# Altium PCB superhet1.PcbDoc (part 4 of 5)
Units mm, origin at the board's own origin, x right, y up, seen from the top; angles counter-clockwise.
Board outline 77 x 100 mm, 4 copper layers (Top Layer, Internal Plane 1, Signal Layer 1, Bottom Layer), stack 0.778 mm thick; 440 components, 348 nets, 1672 pads, 2403 vias.
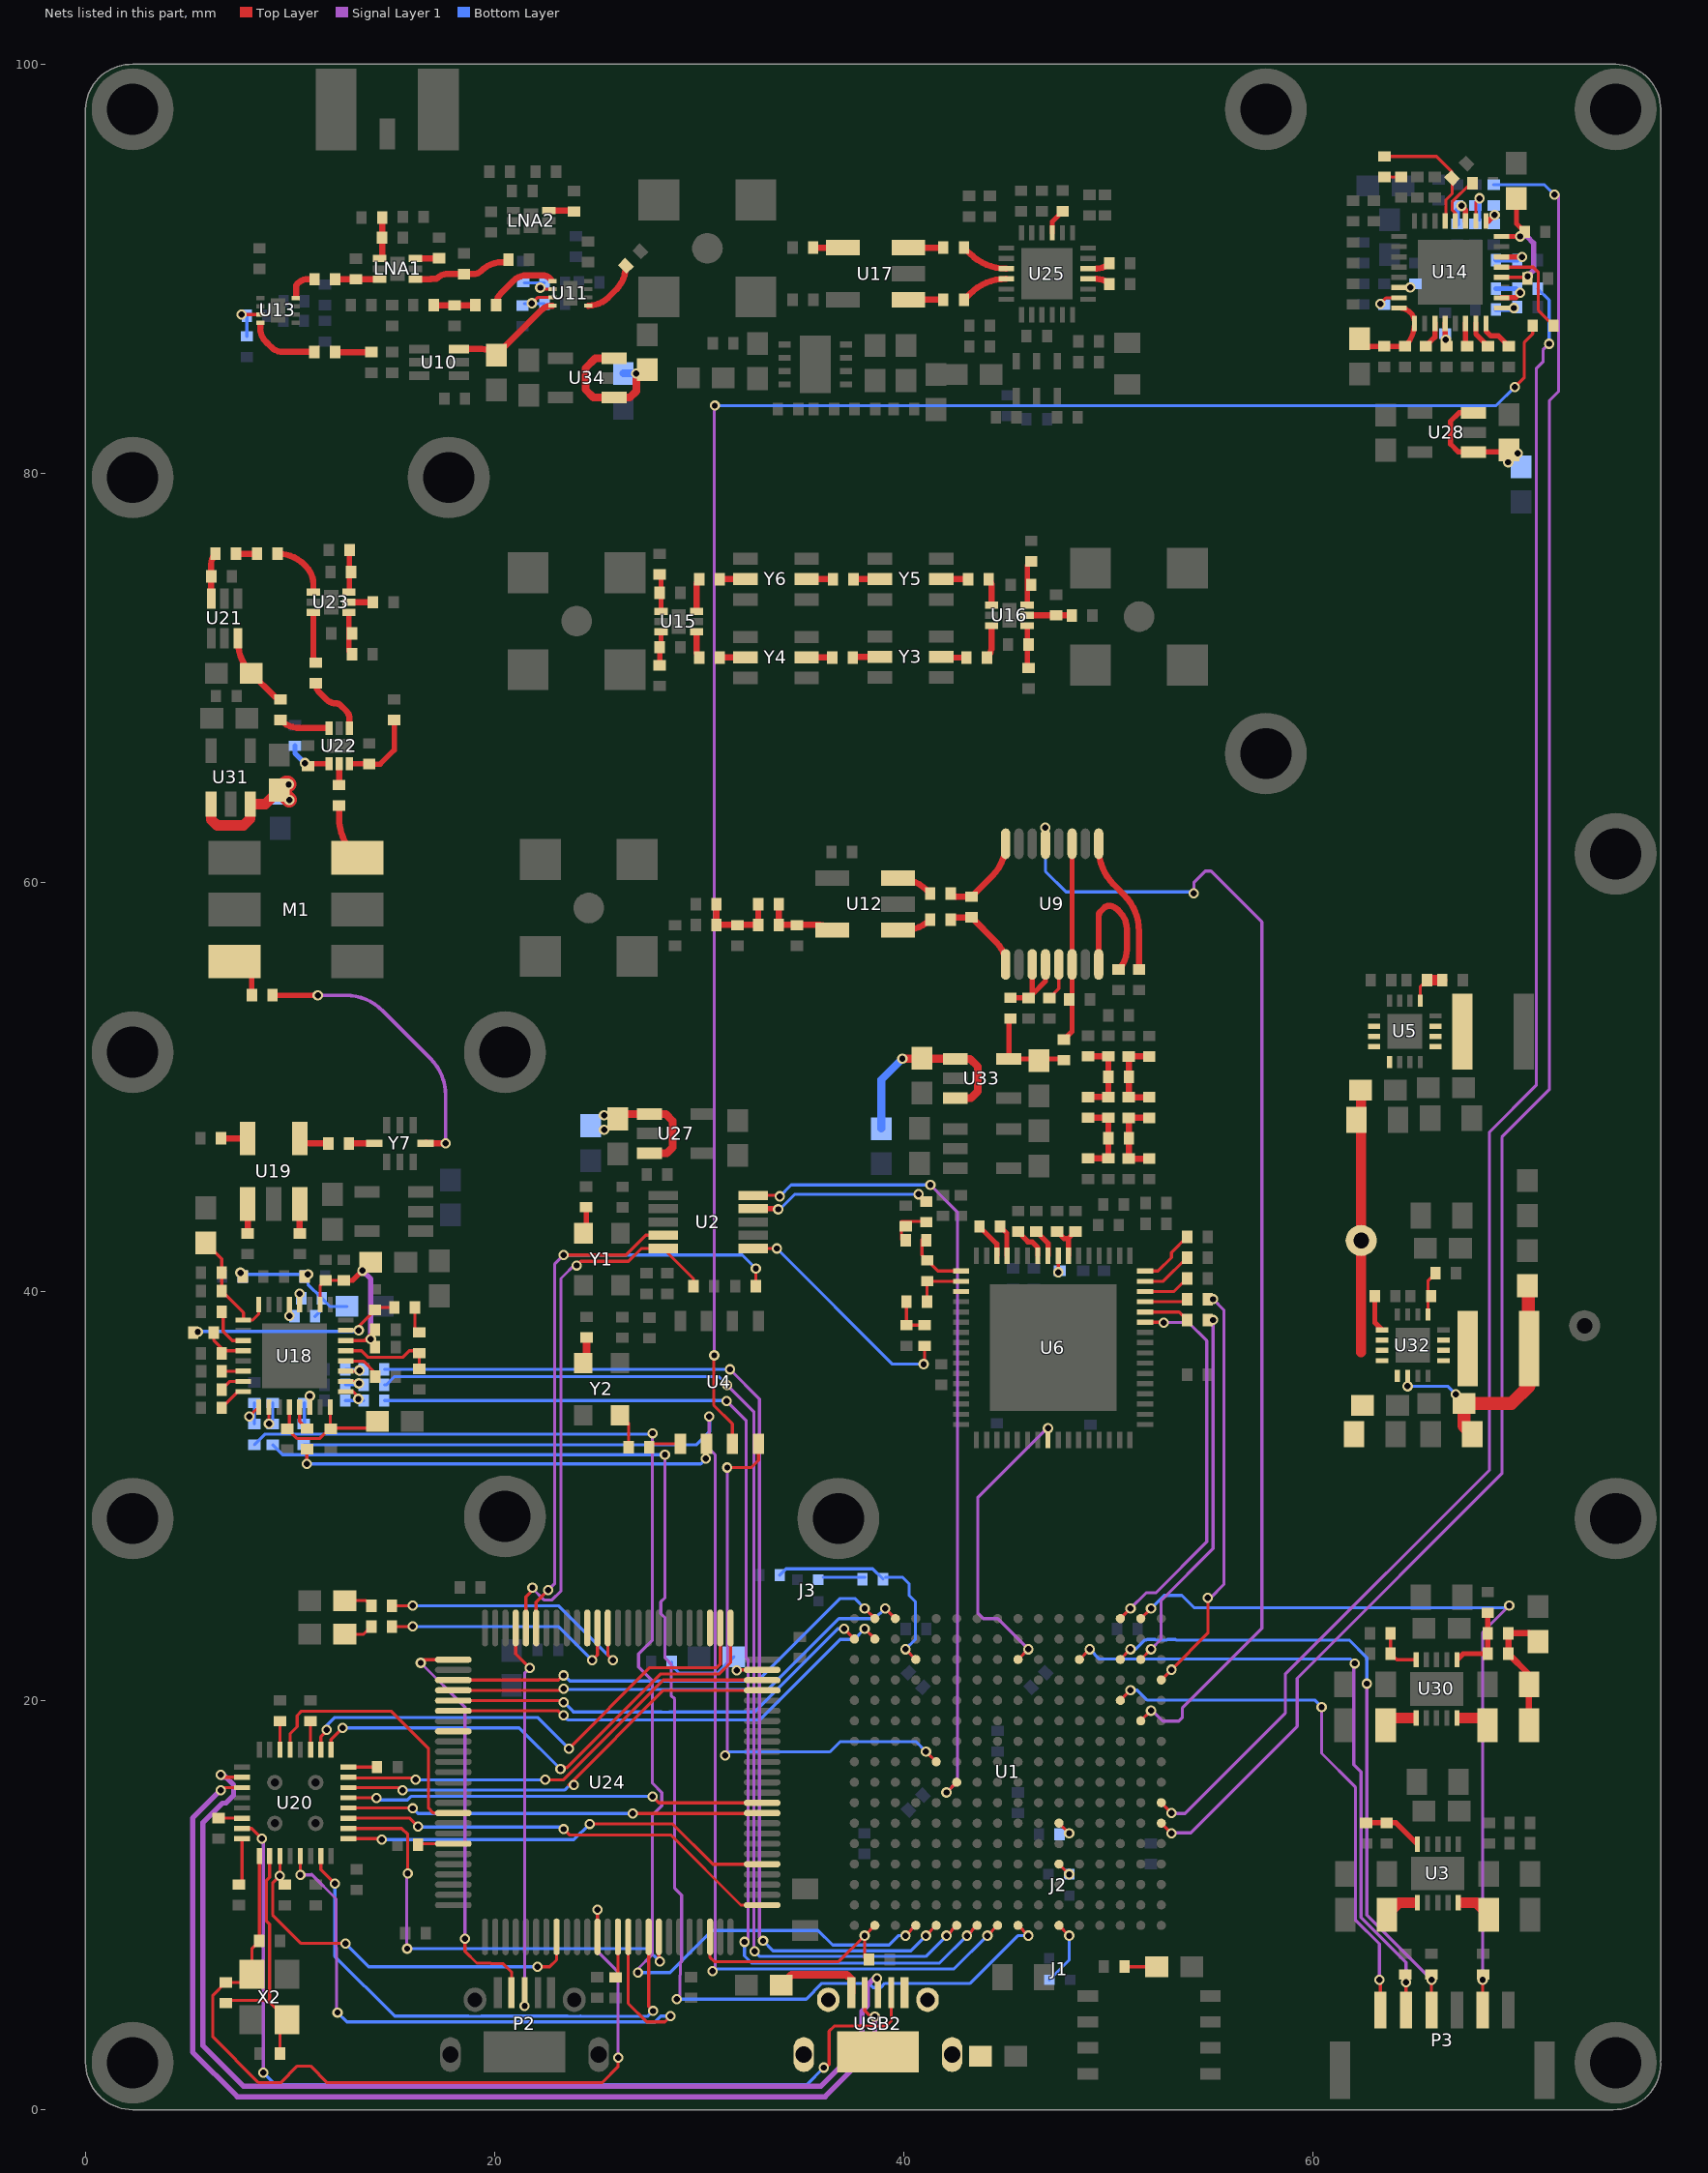
[diagram p6: the nets of this part, all layers, seen from the top]

## Via types
v1: diameter 0.508, hole 0.305, Top Layer to Bottom Layer, 1419 vias
v2: diameter 0.508, hole 0.305, Top Layer to Bottom Layer, tented both sides, 723 vias
v3: diameter 0.5, hole 0.3, Top Layer to Bottom Layer, tented both sides, 254 vias
v4: diameter 1.27, hole 0.762, Top Layer to Bottom Layer, tented both sides, 6 vias
v5: diameter 1.27, hole 0.711, Top Layer to Bottom Layer, tented both sides, 1 vias

## Nets (pads, with @x,y where several pads share a name; then routed paths per layer and width w, separated by ;. In a path a pad name is that pad's centre, name@x,y a point inside that pad or via, vN(x,y) a via of type N, cw(c..) or ccw(c..) an arc to the next point about the centre after c; other vN are vias at no path point) (continued)
NetC71_2: C71.2 U11.1 | length 2.9
  Top Layer w0.305: U11.1@24.57,88.2 ccw(c24.57,89.618) 25.572,88.615 25.927,88.97 ccw(c24.757,90.141) C71.2@26.412,90.141
NetC72_2: C72.2 R65.2 U13.3 | length 1.9
  Top Layer w0.152: v2(7.631,87.768) U13.3@8.538,87.768
  Bottom Layer w0.152: R65.2@7.884,86.698 C72.2@7.884,87.714
NetC74_1: C74.1 U6.57 | length 1.4
  Top Layer w0.254: C74.1@46.482,42.934 47.05,42.366 U6.57@47.05,41.75
NetC75_1: C75.1 C76.1 U6.55 | length 2
  Top Layer w0.254: C75.1@47.498,42.934 47.835,42.597 48.05,42.597 ; U6.55@48.05,41.75 48.05,42.597 ; C76.1@48.387,42.934 48.05,42.597
NetC77_2: C77.2 R68.1 U11.6 | length 1.7
  Top Layer w0.152: v2(22.225,89.078) 22.225,89.002 22.227,89 U11.6@22.83,89
  Bottom Layer w0.152: R68.1@21.444,89.308 C77.2@22.43,89.308
NetC78_2: C78.2 R69.1 U11.7 | length 2.1
  Top Layer w0.152: v2(21.819,88.316) 22.103,88.6 U11.7@22.83,88.6
  Bottom Layer w0.152: R69.1@21.447,88.292 C78.2@22.43,88.292
NetC80_1: C80.1 U12.1 | length 1.8
  Top Layer w0.305: U12.1@39.709,60.212 cw(c39.709,58.252) 41.095,59.638 C80.1@41.283,59.45
NetC80_2: C80.2 R53.1 U9.16 | length 4.2
  Top Layer w0.305: C80.2@42.291,59.45 ccw(c42.651,59.81) 42.651,59.301 R53.1@43.307,59.301 44.326,60.32 ccw(c42.753,61.892) U9.16@44.977,61.892
NetC81_1: C81.1 U9.9 | length 6.7
  Top Layer w0.305: U9.9@49.527,61.892 49.527,61.679 ccw(c52.052,61.679) 50.267,59.893 50.756,59.404 cw(c48.96,57.608) 51.5,57.608 C81.1@51.5,55.75
NetC83_2: C83.2 R35.2 R36.1 R40.1 R105.2 | length 4.1
  Top Layer w0.305: R105.2@30.845,58.94 R35.2@30.845,57.924 R36.1@32.885,57.924 R40.1@32.885,58.94
NetC84_2: C84.2 R36.2 R40.2 U12.4 | length 3.7
  Top Layer w0.305: R40.2@33.893,58.94 R36.2@33.893,57.924 35.901,57.924 cw(c35.901,57.064) U12.4@36.509,57.672
NetC86_1: C86.1 R54.1 R56.2 R59.1 R66.2 | length 4
  Top Layer w0.305: R56.2@49,49.508 R66.2@50,49.508 C86.1@50,50.5 R54.1@50,51.5 R59.1@49,51.5
NetC86_2: C86.2 R37.2 R38.1 R41.2 R51.1 | length 4
  Top Layer w0.305: R51.1@52,49.5 R38.1@51,49.5 R37.2@51,51.492 R41.2@52,51.492
NetC87_1: C87.1 R56.1 R58.2 R66.1 R67.2 | length 4
  Top Layer w0.305: R58.2@49,46.508 R67.2@50,46.508 C87.1@50,47.5 R66.1@50,48.5 R56.1@49,48.5
NetC87_2: C87.2 R38.2 R39.1 R51.2 R52.1 | length 4
  Top Layer w0.305: R52.1@52,46.5 R39.1@51,46.5 R38.2@51,48.492 R51.2@52,48.492
NetC88_1: C88.1 L20.1 | length 1.8
  Top Layer w0.305: C88.1@12.194,85.936 12.202,85.928 L20.1@13.98,85.928
NetC88_2: C88.2 U13.4 | length 3.5
  Top Layer w0.305: U13.4@8.538,87.3 8.538,87.126 8.534,87.122 ccw(c9.516,87.122) 8.822,86.428 9.068,86.182 ccw(c9.662,86.777) 9.662,85.936 C88.2@11.186,85.936
NetC90_1: C90.1 U12.3 | length 1.7
  Top Layer w0.305: U12.3@39.709,57.672 40.057,57.672 ccw(c40.057,59.406) C90.1@41.283,58.18
NetC90_2: C90.2 R53.2 U9.1 | length 4
  Top Layer w0.305: C90.2@42.291,58.18 cw(c42.564,57.907) 42.564,58.293 R53.2@43.307,58.293 44.531,57.069 cw(c43.454,55.992) U9.1@44.977,55.992
NetC91_1: C91.1 U9.8 | length 6.8
  Top Layer w0.305: U9.8@49.527,55.992 49.527,58.381 cw(c49.797,58.381) 49.606,58.572 49.796,58.762 cw(c50.013,58.545) 50.013,58.852 cw(c50.013,58.239) 50.446,58.672 50.546,58.572 cw(c49.688,57.714) 50.902,57.714 50.902,56.72 cw(c49.53,56.72) C91.1@50.5,55.75
NetC92_1: C92.1 R70.2 U9.3 U9.4 | length 4.3
  Top Layer w0.254: R70.2@45.212,54.356 46.109,54.356 C92.1@46.277,54.524 ; U9.3@46.277,55.992 C92.1@46.277,54.524 ; U9.4@46.927,55.992 46.927,55.174 C92.1@46.277,54.524
NetC93_1: C93.1 U9.5 | length 1.8
  Top Layer w0.152: C93.1@47.117,54.348 47.577,54.808 U9.5@47.577,55.992
NetC94_2: C94.2 R107.2 U24.49 | length 5.2
  Top Layer w0.152: v3@31.75,21.336 v3@31.839,21.425 ; v3(31.839,21.481) v3@31.839,21.425 ; U24.49@33.077,21.502 31.916,21.502 v3@31.839,21.425
  Bottom Layer w0.152: R107.2@28.651,21.895 28.651,21.717 29.032,21.336 30.886,21.336 C94.2@31.699,22.149
NetC96_1: C96.1 C97.1 FB3.1 U14.16 U14.17 | length 5
  Top Layer w0.254: FB3.1@61.962,86.563 ccw(c62.807,87.408) 62.807,86.213 C96.1@63.486,86.213 C97.1@64.502,86.213 ccw(c63.387,87.328) 64.964,87.328 U14.17@64.964,87.334 ; U14.16@64.214,88.084 cw(c64.214,87.286) 64.778,87.85 cw(c64.33,87.402) U14.17@64.964,87.402
NetC99_1: C99.1 C131.1 FB4.2 U14.28 U14.32 | length 6.5
  Top Layer w0.152: U14.28@69.214,89.584 C131.1@70.418,89.584
  Top Layer w0.254: U14.32@69.214,91.584 v2(70.127,91.584) C99.1@70.352,91.809 69.952,92.209 FB4.2@69.952,93.142
  Signal Layer 1 w0.254: v2(70.127,91.584) 70.468,91.584 70.79,91.262 70.79,89.921 v2(70.495,89.627)
  Bottom Layer w0.254: v2@70.48,89.611 v2(70.495,89.627)
NetC100_2: C100.2 R31.2 | length 0.8
  Top Layer w0.152: R31.2@63.5,94.488 C100.2@64.313,94.488
NetC101_1: C101.1 U14.19 | length 1.3
  Top Layer w0.254: C101.1@65.518,86.213 65.964,86.659 U14.19@65.964,87.334
NetC102_1: C102.1 Y3.2 | length 1.2
  Top Layer w0.305: Y3.2@41.837,71.021 ccw(c41.905,71.089) 41.905,70.993 C102.1@43.061,70.993
NetC102_2: C102.2 U16.6 | length 1.6
  Top Layer w0.305: C102.2@44.069,70.993 ccw(c43.528,71.534) 44.293,71.534 U16.6@44.293,72.553
NetC103_1: C103.1 U15.4 | length 1.3
  Top Layer w0.305: U15.4@29.87,72.25 29.87,71.314 ccw(c30.314,71.314) C103.1@30,71
NetC103_2: C103.2 Y4.5 | length 1.2
  Top Layer w0.305: C103.2@31.008,71 Y4.5@32.25,71
NetC104_2: C104.2 R74.2 U15.3 | length 1.6
  Top Layer w0.254: R74.2@28.067,70.612 C104.2@28.067,71.501 ; C104.2@28.13,71.564 U15.3@28.13,72.25
NetC105_1: C105.1 Y4.2 | length 1.3
  Top Layer w0.305: Y4.2@35.25,71 C105.1@36.5,71
NetC105_2: C105.2 Y3.5 | length 1.3
  Top Layer w0.305: C105.2@37.508,71 cw(c37.559,70.949) 37.559,71.021 Y3.5@38.837,71.021
NetC106_2: C106.2 R75.2 U16.1 | length 2
  Top Layer w0.254: R75.2@46.033,70.553 U16.1@46.033,72.553
NetC107_2: C107.2 R76.2 U15.1 | length 1.7
  Top Layer w0.254: U15.1@28.13,73.25 R76.2@28.13,74.994
NetC108_2: C108.2 R61.2 U20.25 U24.12 X2.3 | length 41.5
  Top Layer w0.152: U20.25@8.5,12.4 8.5,8.258 C108.2@8.492,8.25 8.136,7.894 X2.3@8.136,6.618 7.742,6.223 R61.2@6.858,6.223 6.223,5.588 6.223,3.556 8.458,1.321 9.539,1.321 10.352,2.134 10.998,2.134 11.811,1.321 25.248,1.321 26.035,2.108 v3(26.035,2.54) ; v3(25.019,9.779) 25.027,9.771 U24.12@25.027,8.452
  Signal Layer 1 w0.152: v3(25.019,9.779) 25.019,7.747 26.035,6.731 v3(26.035,2.54)
NetC110_2: C110.2 R61.1 U20.26 X2.1 | length 12.6
  Top Layer w0.152: R61.1@6.858,5.215 6.858,5.34 8.91,5.34 9,5.25 ; U20.26@9,12.4 9,11.361 8.839,11.2 8.839,9.238 9,9.077 9,5.25 ; C110.2@9.508,2.75 9.508,4.058 X2.1@9.85,4.4 9,5.25
NetC111_1: C111.1 C222.2 U16.2 | length 2.2
  Top Layer w0.178: C222.2@48.207,73.053 C222.2@48.209,73.05
  Top Layer w0.305: U16.2@46.036,73.05 C222.2@48.209,73.05
NetC112_1: C112.1 Y5.2 | length 1.3
  Top Layer w0.305: Y5.2@41.837,74.831 C112.1@43.139,74.831
NetC112_2: C112.2 U16.4 | length 1.3
  Top Layer w0.305: C112.2@44.147,74.831 cw(c43.795,74.478) 44.293,74.478 U16.4@44.293,73.553
NetC113_1: C113.1 U15.6 | length 1.6
  Top Layer w0.305: U15.6@29.87,73.25 29.87,74.517 cw(c30.314,74.517) C113.1@30,74.831
NetC113_2: C113.2 Y6.5 | length 1.2
  Top Layer w0.305: C113.2@31.008,74.831 Y6.5@32.25,74.831
NetC114_1: C114.1 Y6.2 | length 1.3
  Top Layer w0.305: Y6.2@35.25,74.831 C114.1@36.535,74.831
NetC114_2: C114.2 Y5.5 | length 1.3
  Top Layer w0.305: C114.2@37.543,74.831 Y5.5@38.837,74.831
NetC115_2: C115.2 R77.2 U16.3 | length 1.9
  Top Layer w0.254: U16.3@46.033,73.553 R77.2@46.033,75.497
NetC128_1: C128.1 U17.3 | length 1.7
  Top Layer w0.305: U17.3@40.223,88.491 C128.1@41.933,88.491
NetC128_2: C128.2 U25.16 | length 2.4
  Top Layer w0.305: C128.2@42.941,88.491 43.223,88.773 cw(c45.005,86.991) U25.16@45.005,89.511
NetC129_1: C129.1 U17.5 | length 1.5
  Top Layer w0.305: C129.1@35.567,91.031 U17.5@37.023,91.031
NetC132_1: C132.1 C143.1 FB2.2 U18.16 U18.17 | length 5.9
  Top Layer w0.152: FB2.2@5.869,42.378 6.651,41.596 C132.1@6.651,40.919 C143.1@6.651,40.03 7.715,38.966 U18.17@7.715,38.605 8.176,38.605 8.465,38.894 U18.16@8.465,39.355
NetC133_2: C133.2 U25.4 | length 0.7
  Top Layer w0.305: 49.43,90.011 ccw(c49.43,90.892) C133.2@50.053,90.269
NetC134_2: C134.2 U25.3 | length 0.7
  Top Layer w0.305: 49.43,89.511 cw(c49.43,88.63) C134.2@50.053,89.253
NetC135_1: C135.1 C136.1 FB1.1 U18.28 U18.32 | length 6.9
  Top Layer w0.152: C136.1@9.855,33.291 10.33,32.817 11.463,32.817 C135.1@11.965,33.319 ; C136.1@9.965,33.401 U18.28@9.965,34.355 ; U18.32@11.965,34.355 C135.1@11.965,33.319 ; FB1.1@14.263,33.655 13.927,33.319 C135.1@11.965,33.319
NetC137_1: C137.1 C138.1 C139.1 C140.1 FB6.1 U18.6 U18.10 | length 9.7
  Top Layer w0.152: U18.10@11.465,39.355 11.465,40.272 C139.1@11.739,40.546 ; C139.1@11.739,40.546 C140.1@12.624,40.546 ; U18.6@12.715,37.605 13.635,37.605 ; C137.1@14.156,37.287 13.838,37.605 13.635,37.605 ; C138.1@14.156,38.125 13.635,37.605
  Top Layer w0.254: C140.1@12.624,40.546 13.056,40.546 v2(13.531,41.021) FB6.1@13.937,41.427
  Signal Layer 1 w0.254: v2(13.531,41.021) 13.945,40.607 v2(13.945,37.668)
NetC141_1: C141.1 C142.1 FB8.2 L2.1 L5.1 R84.1 R85.1 | length 8
  Top Layer w0.152: v2(7.569,40.919) 7.569,40.652 L5.1@7.683,40.538 ; L2.1@10.715,40.538 10.871,40.694 v2(10.871,40.843)
  Bottom Layer w0.152: v2(7.569,40.919) 7.645,40.843 v2(10.871,40.843) 10.871,40.353 R84.1@11.549,39.675 11.956,39.268 FB8.2@12.78,39.268 ; R85.1@11.219,38.786 11.477,39.044 R84.1@11.477,39.675
NetC144_1: C144.1 C145.1 R87.2 U18.7 | length 10.9
  Top Layer w0.152: U18.7@12.715,38.105 v2@13.154,38.105 ; v2(13.355,38.105) v2@13.154,38.105 ; C145.1@15.096,39.218 14.267,39.218 C144.1@14.148,39.099 v2@13.154,38.105
  Bottom Layer w0.152: v2(5.486,38.024) 5.512,38.049 13.3,38.049 v2(13.355,38.105)
NetC145_2: C145.2 R88.2 | length 1.3
  Top Layer w0.152: C145.2@16.104,39.218 16.104,38.205 R88.2@16.311,37.998
NetC147_1: C147.1 U18.19 | length 2.2
  Top Layer w0.152: C147.1@6.651,39.014 6.727,39.014 6.727,38.053 7.175,37.605 U18.19@7.715,37.605
NetC148_1: C148.1 U18.23 | length 1.2
  Top Layer w0.152: C148.1@6.651,35.204 7.052,35.605 U18.23@7.715,35.605
NetC149_1: C149.1 U18.24 | length 1.4
  Top Layer w0.152: C149.1@6.651,34.315 7.441,35.105 U18.24@7.715,35.105
NetC150_2: C150.2 U19.1 | length 1.4
  Top Layer w0.305: C150.2@10.469,42.836 U19.1@10.469,44.284
NetC151_1: C151.1 U19.4 | length 1.3
  Top Layer w0.305: C151.1@6.619,47.492 U19.4@7.921,47.492
NetC152_2: C152.2 U19.3 | length 1.4
  Top Layer w0.305: C152.2@7.929,42.836 U19.3@7.929,44.284
NetC153_1: C153.1 U19.5 | length 1.5
  Top Layer w0.305: U19.5@10.469,47.484 ccw(c11.053,48.068) 11.053,47.242 C153.1@11.869,47.242
NetC153_2: C153.2 Y7.4 | length 1.2
  Top Layer w0.305: C153.2@12.877,47.242 Y7.4@14.119,47.242
NetC155_2: C155.2 L7.2 U21.3 | length 2.2
  Top Layer w0.305: U21.3@6.14,73.881 6.14,75.566 cw(c6.857,75.566) L7.2@6.35,76.073
NetC156_2: C156.2 R92.2 U22.3 | length 3.9
  Top Layer w0.254: U22.3@12.895,65.805 C156.2@13.849,65.805 ; C156.2@13.868,65.786 14.402,65.786 15.088,66.472 R92.2@15.088,67.945
NetC157_2: C157.2 R91.2 U23.1 | length 1.9
  Top Layer w0.254: R91.2@12.877,71.304 U23.1@12.877,73.198
NetC158_1: C158.1 L6.2 U21.6 | length 3.8
  Top Layer w0.305: U21.6@7.44,71.941 7.44,71.831 ccw(c9.702,71.831) L6.2@8.103,70.231 9.278,69.055 ccw(c9.525,69.302) C158.1@9.525,68.953
NetC158_2: C158.2 U22.6 | length 2.5
  Top Layer w0.305: C158.2@9.525,67.945 ccw(c10.491,68.911) 10.491,67.545 U22.6@11.895,67.545
NetC159_1: C159.1 U23.4 | length 2.9
  Top Layer w0.305: C159.1@9.39,76.073 cw(c9.39,74.214) 10.704,75.529 10.77,75.463 cw(c9.883,74.576) 11.137,74.576 U23.4@11.137,74.198
NetC159_2: C159.2 L7.1 | length 1
  Top Layer w0.305: L7.1@7.358,76.073 C159.2@8.382,76.073
NetC160_1: C160.1 U23.2 | length 1.2
  Top Layer w0.305: U23.2@12.877,73.698 C160.1@14.047,73.698
NetC161_1: C161.1 U22.2 | length 1.1
  Top Layer w0.305: U22.2@12.395,65.805 12.395,65.007 ccw(c12.742,65.007) C161.1@12.497,64.762
NetC161_2: C161.2 M1.3 | length 2.8
  Top Layer w0.305: C161.2@12.395,63.754 12.395,63.158 ccw(c14.935,63.158) 13.139,61.362 M1.3@13.287,61.214
NetC162_2: C162.2 R94.2 U22.1 | length 2.2
  Top Layer w0.254: v2(10.719,65.837) C162.2@10.871,65.684 ; C162.2@10.992,65.805 U22.1@11.895,65.805
  Bottom Layer w0.254: R94.2@10.236,66.675 10.236,66.319 v2(10.719,65.837)
NetC163_2: C163.2 R93.2 U23.3 | length 2
  Top Layer w0.254: U23.3@12.903,74.224 R93.2@12.903,76.251
NetC164_1: C164.1 U23.6 | length 2.5
  Top Layer w0.305: U23.6@11.137,73.198 11.137,71.023 ccw(c11.523,71.023) C164.1@11.25,70.75
NetC164_2: C164.2 U22.4 | length 3
  Top Layer w0.305: C164.2@11.25,69.742 ccw(c11.904,69.742) 11.441,69.28 11.766,68.955 ccw(c12.243,69.432) 12.243,68.758 cw(c12.243,68.451) 12.46,68.668 12.751,68.377 cw(c12.402,68.028) 12.895,68.028 U22.4@12.895,67.545
NetC166_2: C166.2 C168.2 LNA1.4 | length 4.8
  Top Layer w0.305: LNA1.4@16.12,89.5 16.881,89.5 16.891,89.51 17.063,89.51 ccw(c17.063,89.77) 17.247,89.586 cw(c17.624,89.209) 17.624,89.742 C166.2@18.5,89.742 18.971,89.742 ccw(c18.971,90.249) 19.329,89.891 cw(c20.376,88.844) 20.376,90.324 C168.2@20.652,90.324
NetC167_1: C167.1 LNA1.1 R95.1 | length 1.9
  Top Layer w0.305: LNA1.1@14.5,90.62 R95.1@14.5,92.5
NetC169_2: C169.2 C183.2 LNA1.3 | length 2.2
  Top Layer w0.305: C183.2@12.202,89.492 12.21,89.5 LNA1.3@14.38,89.5
NetC170_1: C170.1 U2.9 | length 8.4
  Top Layer w0.254: U2.9@32.639,44.054 33.848,44.054 33.858,44.044 v2(33.858,44.018)
  Bottom Layer w0.152: v2(33.858,44.018) 33.946,44.018 34.683,44.755 v2(40.716,44.755)
NetC170_2: C170.2 C172.2 R100.2 | length 1.9
  Top Layer w0.152: R100.2@39.878,42.545 39.878,43.434 C170.2@40.894,43.434
NetC171_1: C171.1 U2.6 | length 11.6
  Top Layer w0.152: U2.6@32.639,42.104 v2(33.791,42.104) ; v2(40.97,36.449) 41.021,36.5 C171.1@41.021,37.346
  Bottom Layer w0.152: v2(33.791,42.104) 39.446,36.449 v2(40.97,36.449)
NetC171_2: C171.2 C173.2 R101.2 | length 2
  Top Layer w0.152: R101.2@40.132,39.497 C173.2@40.132,38.354 C171.2@41.021,38.354
NetC175_1: C175.1 U17.1 | length 1.7
  Top Layer w0.305: U17.1@40.223,91.031 C175.1@41.933,91.031
NetC175_2: C175.2 U25.15 | length 2.4
  Top Layer w0.305: C175.2@42.941,91.031 43.223,90.749 ccw(c45.005,92.532) U25.15@45.005,90.011
NetC180_2: C180.2 R126.2 U27.1 U27.3 | length 5.1
  Top Layer w0.381: C180.2@26.246,48.674 U27.1@27.561,48.674 28.364,48.674 28.702,48.336 28.702,47.041 28.42,46.759 U27.3@27.561,46.759
  other v2: 25.349,47.904 25.349,48.616
NetC181_2: C181.2 R130.2 U28.1 U28.3 | length 5.3
  Top Layer w0.254: U28.3@67.854,82.961 67.137,82.961 66.726,82.55 66.726,81.432 67.112,81.046 U28.1@67.854,81.046 C181.2@69.489,81.046
  other v2: 69.545,80.543 70.002,80.975
NetC183_1: C183.1 U13.8 | length 1.5
  Top Layer w0.305: 10.287,88.671 10.287,89.097 cw(c10.547,89.097) 10.363,89.281 cw(c10.873,88.772) 10.873,89.492 C183.1@11.194,89.492
NetC185_1: C185.1 U14.24 | length 1.8
  Top Layer w0.254: U14.24@68.464,87.334 68.464,86.959 68.469,86.959 68.707,86.721 69.074,86.721 C185.1@69.582,86.213
NetC186_1: C186.1 U14.23 | length 1.4
  Top Layer w0.254: U14.23@67.964,87.334 67.964,86.815 C186.1@68.566,86.213
NetC190_1: C190.1 R110.1 R111.1 U30.1 | length 3.6
  Top Layer w0.254: U30.1@67.044,21.997 67.343,22.296 R110.1@68.545,22.296 C190.1@68.545,23.296 R111.1@68.545,24.296
NetC190_2: C190.2 C191.2 L10.2 R7.2 R110.2 | length 6.5
  Top Layer w0.305: L10.2@70.561,18.796 C191.2@70.561,20.796 70.561,21.288 R110.2@69.553,22.296 C190.2@69.553,23.296 70.582,23.296 R7.2@70.993,22.885
NetC193_2: C193.2 R127.2 U31.1 U31.3 | length 6.6
  Top Layer w0.508: U31.1@6.137,63.825 6.137,63.078 6.426,62.789 7.722,62.789 8.052,63.119 U31.3@8.052,63.825 8.784,63.825 C193.2@9.474,64.516
  Top Layer w0.762: v2(9.931,64.795) 9.881,64.846 9.804,64.846 C193.2@9.474,64.516 v2(9.957,64.033)
NetC194_1: C194.1 Y2.3 | length 1.7
  Top Layer w0.152: Y2.3@26.13,33.951 26.551,33.53 C194.1@26.551,32.385
NetC194_2: C194.2 U4.1 | length 1.6
  Top Layer w0.152: C194.2@27.559,32.385 27.734,32.56 U4.1@29.083,32.56
NetC195_1: C195.1 Y7.8 | length 14.2
  Top Layer w0.254: C195.1@9.136,54.483 v2(11.354,54.483)
  Top Layer w0.305: Y7.8@16.619,47.242 cw(c16.685,47.176) 16.685,47.269 16.711,47.244 v2(17.602,47.244)
  Signal Layer 1 w0.178: v2(11.354,54.483) 12.715,54.483 cw(c12.715,51.943) 14.511,53.739 16.858,51.392 cw(c15.062,49.595) 17.602,49.595 v2(17.602,47.244)
NetC195_2: C195.2 M1.6 | length 0.8
  Top Layer w0.254: C195.2@8.128,54.483 8.128,55.293
NetC196_1: C196.1 U11.5 | length 3.5
  Top Layer w0.305: C196.1@20.068,88.222 cw(c20.912,88.222) 20.315,88.819 20.904,89.408 cw(c21.579,88.733) 21.579,89.687 22.353,89.687 cw(c22.353,89.231) 22.676,89.554 U11.5@22.765,89.465
NetC196_2: C196.2 R18.1 R104.1 | length 2
  Top Layer w0.305: R104.1@17.02,88.222 C196.2@19.06,88.222
NetC199_2: C199.2 C200.2 L11.2 R124.2 U32.14 | length 12.8
  Top Layer w0.152: v2(64.631,35.37) U32.14@64.631,35.873
  Top Layer w0.635: C200.2@67.79,33.027 67.388,33.43 C199.2@67.388,34.527 69.706,34.527 70.564,35.385 L11.2@70.564,37.211 ; R124.2@70.485,40.284 70.524,40.245 L11.2@70.524,37.527
  Bottom Layer w0.152: v2(64.631,35.37) 66.585,35.37 v2(66.98,34.976)
NetC201_1: C201.1 U32.9 | length 1.8
  Top Layer w0.254: C201.1@63.024,39.777 63.024,38.48 U32.9@63.381,38.123
NetC203_2: C203.2 R129.2 U33.1 U33.3 | length 10.1
  Top Layer w0.381: v2(39.929,51.384) 42.5,51.384 U33.1@42.515,51.369 43.246,51.369 43.612,51.003 43.612,49.784 43.282,49.454 U33.3@42.515,49.454
  Bottom Layer w0.381: R129.2@38.9,47.964 38.9,50.355 v2(39.929,51.384)
NetC204_1: C204.1 R114.1 U14.3 | length 1.5
  Top Layer w0.254: v2(67.259,93.078) 67.464,92.873 U14.3@67.464,92.334
  Bottom Layer w0.254: C204.1@67.056,92.194 R114.1@67.056,92.874
NetC205_1: C205.1 R113.1 U14.2 | length 2.2
  Top Layer w0.152: U14.2@67.964,92.334 67.964,93.262 v2(68.148,93.447)
  Bottom Layer w0.152: C205.1@68.148,92.397 v2(68.148,93.447)
NetC206_1: C206.1 R112.1 U14.1 | length 0.5
  Top Layer w0.254: U14.1@68.464,92.334 68.585,92.334 v2(68.885,92.634)
NetC207_1: C207.1 R115.1 U14.30 | length 2
  Top Layer w0.254: U14.30@69.214,90.584 v2(70.223,90.584)
  Bottom Layer w0.254: C207.1@68.953,90.424 R115.1@69.985,90.424
NetC208_1: C208.1 R116.1 U14.25 | length 1.4
  Top Layer w0.254: U14.25@69.214,88.084 v2(69.828,88.084)
  Bottom Layer w0.254: C208.1@68.953,88.011 R116.1@69.755,88.011
NetC209_1: C209.1 R117.1 U14.26 | length 2
  Top Layer w0.254: U14.26@69.214,88.584 69.214,88.592 69.923,88.592 70.129,88.798 v2(70.129,88.824)
  Bottom Layer w0.254: C209.1@68.953,89.027 R117.1@69.926,89.027
NetC210_1: C210.1 R120.1 U18.3 | length 1.4
  Top Layer w0.152: U18.3@12.715,36.105 13.397,36.105 13.397,36.133 v2(13.386,36.144)
  Bottom Layer w0.152: C210.1@12.692,36.195 v2@13.335,36.195
NetC211_1: C211.1 R119.1 U18.2 | length 1.3
  Top Layer w0.152: U18.2@12.715,35.605 13.29,35.605 13.36,35.535 v2(13.36,35.509)
  Bottom Layer w0.152: C211.1@12.692,35.433 v2@13.284,35.433
NetC212_1: C212.1 R118.1 U18.1 | length 1.7
  Top Layer w0.152: U18.1@12.715,35.105 13.079,35.105 13.335,34.849 v2(13.335,34.747)
  Bottom Layer w0.152: C212.1@12.692,34.671 R118.1@13.597,34.671
NetC213_1: C213.1 R121.1 U18.30 | length 1.5
  Top Layer w0.152: U18.30@10.965,34.355 v2(10.965,34.894)
  Bottom Layer w0.152: R121.1@10.693,33.545 C213.1@10.693,34.552
NetC214_1: C214.1 R122.1 U18.26 | length 1.7
  Top Layer w0.152: v2(8.965,33.529) U18.26@8.965,34.355 U18.26@8.966,34.356
  Bottom Layer w0.152: R122.1@9.144,33.708 C214.1@9.144,34.552
NetC215_1: C215.1 R123.1 U18.25 | length 1.7
  Top Layer w0.152: v2(8.001,33.891) U18.25@8.465,34.355
  Bottom Layer w0.152: R123.1@8.255,33.52 C215.1@8.255,34.552
NetC218_1: C218.1 U4.2 | length 21.1
  Top Layer w0.152: v3(10.82,31.572) C218.1@10.82,32.291 ; v3(30.328,31.826) 30.353,31.852 U4.2@30.353,32.56
  Bottom Layer w0.152: v3(10.82,31.572) 30.074,31.572 v3(30.328,31.826)
NetC218_2: C218.2 U18.29 | length 1.2
  Top Layer w0.152: U18.29@10.465,34.355 10.465,33.655 C218.2@10.82,33.299
NetC219_1: C219.1 U4.3 | length 94
  Top Layer w0.152: v3(30.734,36.881) 30.709,36.855 30.709,34.442 31.623,33.528 U4.3@31.623,32.56 ; v3(69.875,84.226) 70.333,84.684 70.333,86.411 70.747,86.825 C219.1@70.747,87.224
  Signal Layer 1 w0.152: v3(30.734,36.881) v3@30.734,83.312
  Bottom Layer w0.152: v3(30.759,83.312) 68.961,83.312 v3(69.875,84.226)
NetC219_2: C219.2 U14.29 | length 4.8
  Top Layer w0.152: U14.29@69.214,90.084 70.764,90.084 71.018,89.83 71.018,87.96 C219.2@71.755,87.224
NetC221_2: C221.2 R131.2 U34.1 U34.3 | length 6.9
  Top Layer w0.381: U34.3@25.837,85.623 24.917,85.623 24.435,85.141 24.435,84.099 24.826,83.708 U34.1@25.837,83.708 26.609,83.708 26.924,84.023 v2(26.924,84.887)
  Bottom Layer w0.381: R131.2@26.289,84.887 v2(26.924,84.887)
NetJ1_2: J1.2 U1.T11 | length 3.3
  Top Layer w0.152: U1.T11@47.585,9.01 v2(48.085,8.51)
  Bottom Layer w0.152: J1.2@47.117,6.35 48.085,7.318 v2(48.085,8.51)
NetJ2_2: J2.2 U1.N11 | length 0.7
  Top Layer w0.152: U1.N11@47.585,12.01 v2(48.085,11.51)
NetJ3_2: J3.2 R42.1 | length 2
  Bottom Layer w0.152: 36.068,26.035 37.846,26.035 R42.1@38.108,26.035
NetL3_1: L3.1 LNA2.6 | length 1.2
  Top Layer w0.305: LNA2.6@22.65,92.843 L3.1@23.845,92.843
NetL8_1: L8.1 LNA1.6 | length 1.2
  Top Layer w0.305: LNA1.6@16.12,90.5 17.243,90.5 ccw(c17.243,90.555) L8.1@17.282,90.516
NetL9_1: L9.1 U30.6 | length 1.5
  Top Layer w0.508: L9.1@63.561,18.796 63.911,19.146 64.897,19.146
NetL10_1: L10.1 U30.10 | length 1.5
  Top Layer w0.508: 67.183,19.146 68.179,19.146 L10.1@68.529,18.796
NetL11_1: L11.1 U32.1 U32.2 U32.3
NetL12_1: L12.1 U5.1 U5.2 U5.3
NetL16_2: L16.2 U10.6 U11.8 | length 5.6
  Top Layer w0.305: U10.6@18.252,86.078 19.365,86.078 cw(c19.365,85.073) L16.2@20.076,85.784 22.254,87.961 cw(c22.83,87.385) U11.8@22.83,88.2
NetL17_1: L17.1 U3.6 | length 1.5
  Top Layer w0.508: L17.1@63.622,9.525 64.222,10.125 64.897,10.125
NetL18_1: L18.1 U3.10 | length 1.5
  Top Layer w0.508: 67.31,10.125 67.99,10.125 L18.1@68.59,9.525
NetLED1_2: LED1.2 R21.2 | length 1.4
  Top Layer w0.152: LED1.2@12.675,24.892 13.716,24.892 R21.2@13.97,24.638
NetLED2_2: LED2.2 R22.2 | length 1.5
  Top Layer w0.152: LED2.2@12.675,23.241 13.589,23.241 R22.2@13.97,23.622
NetLED3_1: LED3.1 R43.2 | length 1.6
  Top Layer w0.152: R43.2@50.787,6.99 52.358,6.99 LED3.1@52.363,6.985
NetR2_2: R2.2 R81.1 U32.5 | length 2.2
  Top Layer w0.152: U32.5@65.631,38.873 65.631,40.536 R2.2@65.989,40.894
NetR3_2: R3.2 U24.94 | length 1.7
  Top Layer w0.152: R3.2@16.256,12.954 16.304,13.002 U24.94@17.977,13.002
NetR4_1: R4.1 U24.14 | length 2
  Top Layer w0.152: R4.1@25.908,6.469 26.027,6.588 U24.14@26.027,8.452
NetR5_2: R5.2 U2.5 U24.71 | length 27.7
  Top Layer w0.152: U24.71@21.527,23.552 21.527,25.075 21.971,25.519 21.971,25.527 v3(21.844,25.527) ; v3(24.003,41.275) 24.206,41.478 26.542,41.478 27.168,42.104 U2.5@28.239,42.104 29.718,40.625 R5.2@29.718,40.259
  Signal Layer 1 w0.152: v3(21.844,25.527) 21.844,25.485 22.408,24.921 22.804,24.921 23.241,25.358 23.241,40.64 24.003,41.402 v3(24.003,41.275)
NetR6_2: R6.2 U2.4 U24.70 | length 34.6
  Top Layer w0.152: U24.70@22.027,23.552 22.027,24.821 v3(22.606,25.4) ; v3(23.368,41.783) 26.416,41.783 27.387,42.754 U2.4@28.239,42.754 ; R6.2@32.766,40.259 v3(32.766,41.123)
  Signal Layer 1 w0.152: v3(22.606,25.4) 22.936,25.73 22.936,41.351 v3(23.368,41.783)
  Bottom Layer w0.152: v3(23.368,41.783) 32.106,41.783 v3(32.766,41.123)
NetR10_1: R10.1 U25.9 | length 1.3
  Top Layer w0.254: U25.9@47.255,91.761 47.255,92.305 R10.1@47.767,92.817
NetR11_1: R11.1 R12.1 U3.5 | length 2.9
  Top Layer w0.254: R11.1@62.606,14.025 R12.1@63.606,14.025 64.056,14.025 U3.5@65.105,12.976
NetR15_2: R15.2 R17.1 U5.5 | length 1.9
  Top Layer w0.152: U5.5@65.246,54.223 65.246,54.893 R17.1@65.576,55.223
  Top Layer w0.508: R17.1@65.576,55.223 R15.2@66.318,55.223
NetR20_2: R20.2 U6.47 | length 2.5
  Top Layer w0.152: U6.47@51.8,40.5 52.692,40.5 R20.2@53.848,41.656
NetR21_1: R21.1 U24.63 | length 13.6
  Top Layer w0.152: R21.1@14.978,24.638 v3(16.002,24.638) ; U24.63@25.527,23.552 25.527,22.225 v3(25.781,21.971)
  Bottom Layer w0.152: v3(16.002,24.638) 23.114,24.638 v3(25.781,21.971)
NetR22_1: R22.1 U24.64 | length 12.2
  Top Layer w0.152: R22.1@14.978,23.622 v3(16.002,23.622) ; v3(24.765,21.971) 25.027,22.233 U24.64@25.027,23.552
  Bottom Layer w0.152: v3(16.002,23.622) 23.114,23.622 v3(24.765,21.971)
NetR23_1: R23.1 U20.14 | length 1.4
  Top Layer w0.152: U20.14@9.5,17.6 R23.1@9.5,19
NetR24_1: R24.1 U20.11 | length 1.4
  Top Layer w0.152: U20.11@11,17.6 R24.1@11,19
NetR25_1: R25.1 U20.8 | length 1.4
  Top Layer w0.152: U20.8@12.85,16.75 R25.1@14.25,16.75
NetR26_1: R26.1 U6.62 | length 1.8
  Top Layer w0.254: R26.1@43.696,43.18 44.55,42.326 U6.62@44.55,41.75
NetR26_2: R26.2 U6.61 | length 1.6
  Top Layer w0.254: R26.2@44.704,43.18 45.034,42.85 45.034,41.766 U6.61@45.05,41.75
NetR27_2: R27.2 U6.48 | length 2.9
  Top Layer w0.152: U6.48@51.8,41 52.43,41 53.086,41.656 53.086,41.91 R27.2@53.848,42.672
NetR28_2: R28.2 U14.15 | length 1
  Top Layer w0.152: v2(63.297,88.29) 63.59,88.584 U14.15@64.214,88.584
NetR29_2: R29.2 U6.56 | length 0.8
  Top Layer w0.152: v2(47.55,40.944) U6.56@47.55,41.75
NetR30_1: R30.1 U14.4 | length 2.3
  Top Layer w0.152: U14.4@66.964,92.334 66.964,92.726 66.802,92.888 66.802,93.267 R30.1@67.718,94.183
NetR31_1: R31.1 R33.2 U14.5 | length 5.9
  Top Layer w0.152: R31.1@63.5,95.496 66.048,95.496 66.773,94.771 R33.2@66.773,94.383 ; U14.5@66.464,92.334 66.497,92.367 66.497,93.357 66.802,93.662 R33.2@66.802,94.132
NetR32_2: R32.2 U14.22 | length 1
  Top Layer w0.254: R32.2@67.464,86.307 U14.22@67.464,87.334
NetR34_2: R34.2 U6.58 | length 1.7
  Top Layer w0.254: R34.2@45.593,42.926 45.593,42.905 46.072,42.426 46.271,42.426 46.55,42.147 U6.58@46.55,41.75
NetR42_2: R42.2 R45.2@33.934,26.137 U1.C4 | length 10.9
  Top Layer w0.152: v2(40.085,22.51) U1.C4@40.585,22.01
  Bottom Layer w0.152: R45.2@33.934,26.137 34.239,26.441 38.481,26.441 R42.2@38.989,25.933 ; R42.2@39.116,26.035 39.929,26.035 40.259,25.705 40.259,25.146 40.568,24.837 40.568,22.993 v2(40.085,22.51)
NetR45_1: R45.1@47.617,13.462 U1.L11 | length 0.7
  Top Layer w0.152: U1.L11@47.585,14.01 v2(48.085,13.51)
NetR46_2: R46.2 USB2.1 | length 4.4
  Top Layer w0.381: R46.2@34.011,6.096 34.519,6.604 37.211,6.604 37.435,6.38 USB2.1@37.435,5.723
NetR47_1: R47.1 USB2.5
NetR60_2: R60.2 U20.22 | length 1.2
  Top Layer w0.152: R60.2@6.5,14.258 6.508,14.25 U20.22@7.65,14.25
NetR62_2: R62.2 U20.24 | length 2.3
  Top Layer w0.152: R62.2@7.5,11.008 7.65,11.158 U20.24@7.65,13.25
NetR72_2: R72.2 U14.14 | length 0.5
  Top Layer w0.152: U14.14@64.214,89.084 v2(64.753,89.084)
NetR84_2: R84.2 U18.12 | length 0.5
  Top Layer w0.152: U18.12@10.465,39.355 v2(10.465,39.894)
NetR85_2: R85.2 U18.13 | length 0.6
  Top Layer w0.152: v2@9.965,38.769 9.965,38.811 U18.13@9.965,39.355
  other v2: 9.96,38.811
NetR86_1: R86.1 U18.4 | length 1.7
  Top Layer w0.152: U18.4@12.715,36.605 12.719,36.601 13.575,36.601 R86.1@14.16,36.017
NetR88_1: R88.1 R89.2 U18.5 | length 4.7
  Top Layer w0.152: U18.5@12.715,37.105 13.492,37.105 13.818,36.779 15.502,36.779 15.828,37.105 16.196,37.105 R88.1@16.311,36.99 R89.2@16.311,36.22
NetR90_2: R90.2 U18.22 | length 1
  Top Layer w0.152: R90.2@6.671,36.105 U18.22@7.715,36.105
NetR96_2: R96.2 U6.46 | length 2.3
  Top Layer w0.152: U6.46@51.8,40 53.208,40 R96.2@53.848,40.64
NetR97_2: R97.2 U6.45 | length 2.1
  Top Layer w0.152: U6.45@51.8,39.5 53.724,39.5 R97.2@53.848,39.624
NetR98_2: R98.2 U6.44 | length 2.2
  Top Layer w0.152: U6.44@51.8,39 53.456,39 R98.2@53.848,38.608
NetR99_1: R99.1 R100.1 U6.1 | length 3
  Top Layer w0.152: R100.1@40.886,42.545 40.886,41.783 R99.1@41.148,41.521 41.669,41 U6.1@42.8,41
NetR99_2: R99.2 R101.1 U6.2 | length 2.6
  Top Layer w0.152: R101.1@41.14,39.497 R99.2@41.14,40.505 ; R99.2@41.161,40.5 U6.2@42.8,40.5
NetR102_1: R102.1 Y1.1 | length 1.1
  Top Layer w0.254: Y1.1@24.476,42.989 R102.1@24.476,44.124
NetR103_1: R103.1 Y2.1 | length 1.1
  Top Layer w0.381: Y2.1@24.5,36.671 R103.1@24.5,37.75
NetR108_1: R108.1 R109.1 U30.5 | length 2.4
  Top Layer w0.152: R108.1@63.795,23.296 R109.1@63.795,22.296 64.094,21.997 U30.5@65.044,21.997
NetR118_2: R118.2 U1.T7 | length 56.8
  Top Layer w0.152: v2(43.085,8.51) U1.T7@43.585,9.01
  Signal Layer 1 w0.152: v3(31.344,34.646) 32.287,33.702 32.287,22.103 32.385,22.006 32.385,8.204 v3(32.207,8.204)
  Bottom Layer w0.152: R118.2@14.605,34.671 31.318,34.671 v3(31.344,34.646) ; v3(32.207,8.204) 32.207,7.518 32.563,7.163 41.738,7.163 v2(43.085,8.51)
NetR119_2: R119.2 U1.T6 | length 55.9
  Top Layer w0.152: v2(42.085,8.51) U1.T6@42.585,9.01
  Signal Layer 1 w0.152: v3(31.369,35.433) 32.668,34.134 32.668,7.794 v3(32.715,7.747)
  Bottom Layer w0.152: R119.2@14.605,35.433 14.689,35.433 15.096,35.839 30.963,35.839 v3(31.369,35.433) ; v3(32.715,7.747) 32.969,7.493 41.068,7.493 v2(42.085,8.51)
NetR120_2: R120.2 U1.T5 | length 54.7
  Top Layer w0.152: v2(41.085,8.51) U1.T5@41.585,9.01
  Signal Layer 1 w0.152: v3(31.496,36.195) 32.948,34.743 32.948,8.429 v3(33.122,8.255)
  Bottom Layer w0.152: R120.2@14.605,36.195 v3(31.496,36.195) ; v3(33.122,8.255) 33.604,7.772 40.347,7.772 v2(41.085,8.51)
NetR121_2: R121.2 U1.T8 | length 63
  Top Layer w0.152: v2(44.085,8.51) U1.T8@44.585,9.01
  Signal Layer 1 w0.152: v3(30.48,33.884) 30.48,32.315 30.781,32.014 30.781,6.905 v3(30.658,6.782)
  Bottom Layer w0.152: R121.2@10.668,32.512 29.87,32.512 30.505,33.147 30.505,33.858 v3(30.48,33.884) ; v3(30.658,6.782) 30.755,6.879 42.454,6.879 v2(44.085,8.51)
NetR122_2: R122.2 U1.T9 | length 65.9
  Top Layer w0.152: U1.T9@45.585,9.01 v2(46.085,8.51)
  Signal Layer 1 w0.152: v3(28.321,32.025) 28.321,25.025 28.122,24.826 28.122,24.251 28.321,24.052 28.321,22.087 28.626,21.782 28.626,20.25 28.8,20.076 28.8,10.824 29.134,10.49 29.134,7.233 29.074,7.173 29.074,6.595 29.058,6.579 29.058,5.55 v3(28.909,5.402)
  Bottom Layer w0.152: R122.2@9.144,32.512 9.631,32.025 v3(28.321,32.025) ; v3(28.909,5.402) 28.914,5.406 35.228,5.406 35.998,6.176 38.293,6.176 38.496,5.973 38.872,5.973 39.075,6.176 43.243,6.176 45.577,8.51 v2(46.085,8.51)
NetR123_2: R123.2 U1.T4 | length 62.5
  Top Layer w0.152: v2(40.085,8.51) U1.T4@40.585,9.01
  Signal Layer 1 w0.152: v3(27,6.706) 26.975,6.706 26.975,6.858 27.711,7.595 27.711,14.41 28.165,14.863 28.165,15.504 27.711,15.957 27.711,20.963 27.03,21.645 27.03,22.286 27.711,22.968 v3(27.711,33.071)
  Bottom Layer w0.152: R123.2@8.255,32.512 8.763,33.02 27.686,33.02 27.711,33.045 v3(27.711,33.071) ; v3(27,6.706) 28.575,6.706 30.632,8.763 35.814,8.763 36.525,8.052 36.526,8.053 39.274,8.053 39.732,8.51 v2(40.085,8.51)
NetU1_A14: U1.A14 U6.43 | length 19
  Top Layer w0.152: U1.A14@50.585,24.01 v2(51.085,24.51) ; U6.43@51.8,38.5 52.686,38.5 v3(52.705,38.481)
  Signal Layer 1 w0.152: v2(51.085,24.51) 51.848,25.273 52.324,25.273 54.813,27.762 54.813,37.592 53.924,38.481 v3(52.705,38.481)
NetU1_B2: U1.B2 U24.81 | length 22.8
  Top Layer w0.152: U24.81@17.977,19.502 23.115,19.502 23.344,19.273 v3(23.368,19.273) ; v2(38.085,23.51) U1.B2@38.585,23.01
  Bottom Layer w0.152: v3(23.368,19.273) 23.591,19.05 32.942,19.05 36.885,22.993 37.568,22.993 v2(38.085,23.51)
NetU1_C9: U1.C9 U6.24 | length 15
  Top Layer w0.152: U1.C9@45.585,22.01 v2(46.085,22.51) ; U6.24@47.05,32.75 v2(47.05,33.314)
  Signal Layer 1 w0.152: v2(46.085,22.51) 44.592,24.003 43.891,24.003 43.612,24.282 43.612,29.921 47.004,33.314 v2(47.05,33.314)
NetU1_H5: U1.H5 U4.4 | length 27.6
  Top Layer w0.152: v3(31.369,31.394) 32.537,31.394 32.893,31.75 U4.4@32.893,32.56 ; v2(41.085,17.51) U1.H5@41.585,17.01
  Signal Layer 1 w0.152: v3(31.267,17.323) 31.369,17.424 v3(31.369,31.394)
  Bottom Layer w0.152: v3(31.267,17.323) 31.441,17.497 36.389,17.497 36.885,17.993 40.602,17.993 v2(41.085,17.51)
NetU1_J6: U1.J6 U2.10 | length 40.1
  Top Layer w0.152: U2.10@32.639,44.704 33.884,44.704 v2(33.934,44.653) ; v2(42.085,15.51) U1.J6@42.585,16.01
  Signal Layer 1 w0.152: v2(41.3,45.212) 42.621,43.891 42.621,16.046 v2(42.085,15.51)
  Bottom Layer w0.152: v2(33.934,44.653) 34.493,45.212 v2(41.3,45.212)
NetU6_3: U6.3
NetU20_23: U20.23 USB2.4 | length 47.3
  Top Layer w0.152: U20.23@7.65,13.75 8.119,13.75 v3(8.611,13.259) ; v3(36.093,2.057) 36.144,2.007 36.347,2.21 36.347,3.835 36.601,4.089 36.779,4.089 36.783,4.093 39.151,4.093 39.385,4.327 USB2.4@39.385,5.723
  Signal Layer 1 w0.152: v3(8.611,13.259) 8.687,13.183 v3(8.687,1.803)
  Bottom Layer w0.152: v3(8.687,1.803) 9.271,1.219 35.255,1.219 v3(36.093,2.057)
NetU24_53: U24.53
PA13: P2.3 U24.72 | length 18.9
  Top Layer w0.152: U24.72@21.053,23.526 U24.72@21.027,23.552 21.027,22.28 v3(21.717,21.59)
  Signal Layer 1 w0.152: v3(21.463,5.08) 21.463,21.336 v3(21.717,21.59)
PA14: P2.2 U24.76 | length 20.4
  Top Layer w0.152: v3(16.383,21.844) 16.541,22.002 U24.76@17.977,22.002 ; v3(18.542,8.357) 18.542,7.747 19.126,7.163 19.811,7.163 19.837,7.137 20.422,7.137 20.828,6.731 20.828,5.738 P2.2@20.813,5.723
  Signal Layer 1 w0.152: v3(16.383,21.844) 18.542,19.685 v3(18.542,8.357)
PC8: U24.65
PC10: U1.A2 U24.78 | length 22.9
  Top Layer w0.152: U24.78@17.977,21.002 23.115,21.002 23.344,21.231 v3(23.368,21.231) ; v2(38.085,24.51) U1.A2@38.585,24.01
  Bottom Layer w0.152: v3(23.368,21.231) 23.392,21.231 23.668,20.955 32.847,20.955 36.885,24.993 37.337,24.993 37.338,24.994 37.601,24.994 v2(38.085,24.51)
PC11: U1.A3 U24.79 | length 23.4
  Top Layer w0.152: U24.79@17.977,20.502 v3@23.292,20.502 ; v2(39.085,24.51) U1.A3@39.585,24.01
  Bottom Layer w0.152: v3@23.363,20.549 33.376,20.549 36.83,24.003 38.578,24.003 v2(39.085,24.51)
  other v3: 23.368,20.578
PC12: U1.B1 U24.80 | length 21.8
  Top Layer w0.152: U24.80@17.977,20.002 23.292,20.002 v3(23.368,19.926) ; v2(37.085,23.51) U1.B1@37.585,23.01
  Bottom Layer w0.152: v3(23.368,19.926) 23.392,19.926 23.847,19.472 23.847,19.447 28.146,19.447 28.159,19.435 28.534,19.435 28.546,19.447 32.705,19.447 36.768,23.51 v2(37.085,23.51)
PD2: U24.83
PROGRAM: R44.2 U1.T2 U24.23 | length 11
  Top Layer w0.152: U24.23@30.527,8.452 30.527,7.446 30.734,7.239 36.814,7.239 v2(38.085,8.51) ; R44.2@38.1,7.417 38.085,7.432 v2(38.085,8.51) ; U1.T2@38.585,9.01 v2(38.085,8.51)
RFEN-2871: R117.2 U1.K16 | length 83.5
  Top Layer w0.152: U1.K16@52.585,15.01 v2(53.085,14.51)
  Signal Layer 1 w0.152: v2(53.085,14.51) 53.117,14.478 53.746,14.478 58.649,19.38 58.649,21.294 68.631,31.276 68.631,47.8 70.917,50.086 70.917,85.115 71.247,85.446 71.247,86.03 v3(71.552,86.335)
  Bottom Layer w0.152: R117.2@70.993,89.027 71.552,88.468 v3(71.552,86.335)
SCLK-2871: R112.2 U1.L16 | length 92.6
  Top Layer w0.152: U1.L16@52.585,14.01 v2(53.085,13.51)
  Signal Layer 1 w0.152: v2(53.085,13.51) 53.113,13.538 54.026,13.538 59.233,18.745 59.233,21.088 69.24,31.095 69.24,47.547 71.556,49.863 71.556,83.545 72.005,83.994 72.005,93.646 71.984,93.624 v3(71.806,93.624)
  Bottom Layer w0.152: R112.2@68.834,94.107 71.323,94.107 v3(71.806,93.624)
SCLK-ADC: R97.1 U1.D16 | length 20.4
  Top Layer w0.152: U1.D16@52.585,21.01 v2(53.085,21.51) 54.864,23.289 v3(54.864,25.019) ; R97.1@54.856,39.624 v3(55.118,39.624)
  Signal Layer 1 w0.152: v3(54.864,25.019) 54.991,25.019 55.651,25.679 55.651,39.091 v3(55.118,39.624)
SCLK-LF: U1.F15 U9.13 | length 58
  Top Layer w0.152: U1.F15@51.585,19.01 v2(52.085,19.51)
  Signal Layer 1 w0.152: v2(52.085,19.51) 52.143,19.51 52.654,18.999 53.442,18.999 53.619,19.177 53.619,19.649 57.506,23.535 57.506,58.064 55.016,60.554 54.737,60.554 54.178,59.995 v3(54.178,59.461)
  Bottom Layer w0.152: v2(46.914,62.687) cw(c46.882,62.655) 46.927,62.655 46.927,60.54 47.93,59.538 54.102,59.538 v3(54.178,59.461)
SDATA-ADC: R98.1 U1.C15 | length 18.3
  Top Layer w0.152: U1.C15@51.585,22.01 v2(52.085,22.51) ; R98.1@54.856,38.608 v3(55.118,38.608)
  Signal Layer 1 w0.152: v2(52.085,22.51) 52.578,23.003 52.578,24.892 55.118,27.432 v3(55.118,38.608)
TCK: P3.3 R49.1 U1.C14 | length 31.6
  Top Layer w0.152: U1.C14@50.585,22.01 v2(51.085,22.51) ; R49.1@65.786,6.612 65.796,6.602 v3(65.796,6.35) P3.3@65.796,4.879
  Signal Layer 1 w0.152: v3(62.636,20.828) 62.636,9.51 v3(65.796,6.35)
  Bottom Layer w0.152: v2(51.085,22.51) 51.332,22.51 51.784,22.962 51.854,22.962 51.885,22.993 52.285,22.993 52.316,22.962 52.854,22.962 52.885,22.993 53.285,22.993 53.316,22.962 61.773,22.962 62.636,22.098 v3(62.636,20.828)
TDI: P3.2 R48.1 U1.C12 | length 32.6
  Top Layer w0.152: U1.C12@48.585,22.01 v2(49.085,22.51) ; P3.2@64.546,4.879 v3(64.546,6.223) ; v3@64.546,6.35 v3(64.546,6.223) ; R48.1@64.643,6.612 64.546,6.515 v3(64.546,6.223)
  Signal Layer 1 w0.152: v3(62.052,21.819) 62.001,21.869 62.001,16.866 62.357,16.51 62.357,9.394 64.546,7.205 v3(64.546,6.223)
  Bottom Layer w0.152: v2(49.085,22.51) 49.568,22.027 61.843,22.027 v3(62.052,21.819)
TDO: P3.1 U1.E14 | length 26.4
  Top Layer w0.152: U1.E14@50.585,20.01 v2(51.085,20.51) ; v3(63.246,6.35) 63.296,6.3 P3.1@63.296,4.879
  Signal Layer 1 w0.152: v3(60.427,19.685) 60.427,17.424 62.078,15.773 62.078,9.278 63.246,8.11 v3(63.246,6.35)
  Bottom Layer w0.152: v2(51.085,20.51) 51.403,20.51 51.885,20.027 60.084,20.027 v3(60.427,19.685)
TMS: P3.5 R50.1 U1.A15 | length 39.3
  Top Layer w0.152: U1.A15@51.585,24.01 v2(52.085,24.51) ; P3.5@68.296,4.879 v3(68.296,6.35) 68.296,6.582 R50.1@68.326,6.612
  Signal Layer 1 w0.152: v3(68.296,6.35) 68.296,23.338 v3(69.596,24.638)
  Bottom Layer w0.152: v2(52.085,24.51) 52.721,25.146 53.594,25.146 54.2,24.54 69.498,24.54 v3(69.596,24.638)
USB_HS_CK: U20.1 U24.30 | length 21.4
  Top Layer w0.152: U20.1@12.85,13.25 14.436,13.25 v3(14.478,13.208) ; v3(24.638,13.97) 28.702,13.97 30.67,12.002 U24.30@33.077,12.002
  Bottom Layer w0.152: v3(14.478,13.208) 23.876,13.208 v3(24.638,13.97)
USB_HS_D0: U20.3 U24.26 | length 22
  Top Layer w0.152: U20.3@12.85,14.25 15.849,14.25 v3(16.256,13.843) ; v3(23.368,13.716) 23.651,13.433 28.604,13.433 32.035,10.002 U24.26@33.077,10.002
  Bottom Layer w0.152: v3(16.256,13.843) 16.277,13.822 23.262,13.822 v3(23.368,13.716)
USB_HS_D1: U20.4 U24.35 | length 20.3
  Top Layer w0.152: U20.4@12.85,14.75 15.984,14.75 v3(16.002,14.732) ; v3(26.746,14.478) 33.053,14.478 U24.35@33.077,14.502
  Bottom Layer w0.152: v3(16.002,14.732) 16.256,14.478 v3(26.746,14.478)
USB_HS_D2: U20.5 U24.36 | length 20.5
  Top Layer w0.152: U20.5@12.85,15.25 v3@14.224,15.25 ; v3(27.711,15.316) 28.026,15.002 U24.36@33.077,15.002
  Bottom Layer w0.152: v3(14.224,15.24) 14.322,15.142 15.736,15.142 15.909,15.316 v3(27.711,15.316)
USB_HS_D3: U20.6 U24.47 | length 22.6
  Top Layer w0.152: U20.6@12.85,15.75 v3@15.369,15.75 ; v3(23.876,15.875) 23.622,15.875 28.249,20.502 U24.47@33.077,20.502
  Bottom Layer w0.152: v3(15.494,15.621) 23.41,15.621 23.664,15.875 v3(23.876,15.875)
USB_HS_D4: U20.7 U24.48 | length 22.6
  Top Layer w0.152: U20.7@12.85,16.25 12.85,16.217 16.041,16.217 v3(16.129,16.129) ; v3(22.479,16.129) 23.368,16.129 28.241,21.002 U24.48@33.077,21.002
  Bottom Layer w0.152: v3(16.129,16.129) 22.733,16.129
USB_HS_D5: U20.9 U24.51 | length 25
  Top Layer w0.152: U20.9@12,17.6 12,18.096 v3(12.573,18.669) ; v3(23.215,16.653) 23.326,16.764 23.368,16.764 23.406,16.726 23.533,16.726 28.115,21.307 30.988,21.307 31.527,21.846 U24.51@31.527,23.552
  Bottom Layer w0.152: v3(12.573,18.669) 21.199,18.669 v3(23.215,16.653)
USB_HS_D6: U20.10 U24.52 | length 24.8
  Top Layer w0.152: U20.10@11.5,17.6 11.5,18.231 11.811,18.542 v3(11.79,18.563) ; v3(23.622,17.653) 27.581,21.612 30.861,21.612 31.027,21.778 U24.52@31.027,23.552
  Bottom Layer w0.152: v3(11.79,18.563) 11.79,18.775 12.192,19.177 22.098,19.177 v3(23.622,17.653)
USB_HS_D7: U20.13 U24.91 | length 13.3
  Top Layer w0.152: U20.13@10,17.6 10,18.382 10.344,18.726 10.344,19.268 10.559,19.483 14.934,19.483 16.764,17.653 16.764,14.732 16.994,14.502 U24.91@17.977,14.502
USB_HS_DIR: U20.31 U24.17 | length 25.8
  Top Layer w0.152: U20.31@11.5,12.4 11.5,11.741 v3(12.192,11.049) ; U24.17@27.527,8.452 27.527,5.036 v3(27.737,4.826)
  Bottom Layer w0.152: v3(12.192,11.049) 12.192,7.493 15.113,4.572 18.724,4.572 18.726,4.57 19.35,4.57 19.352,4.572 23.574,4.572 23.576,4.57 24.2,4.57 ; 24.202,4.572 24.2,4.57 ; v3(27.737,4.826) 27.481,4.57 24.2,4.57
USB_HS_N: U20.19 USB2.2 | length 52.8
  Top Layer w0.152: v3(6.604,15.623) 6.731,15.75 U20.19@7.65,15.75 ; USB2.2@38.085,5.723 38.1,5.708 38.1,4.826 38.481,4.445 v3(38.583,4.547)
  Signal Layer 1 w0.254: v3(6.604,15.623) 5.232,14.251 5.232,2.819 7.417,0.635 36.151,0.635 38.583,3.066 v3(38.583,4.547)
USB_HS_NXT: U20.2 U24.18 | length 22.5
  Top Layer w0.152: U20.2@12.85,13.75 15.46,13.75 15.748,13.462 v3(15.748,11.557) ; U24.18@28.027,8.452 28.027,7.279 v3(28.067,7.239)
  Signal Layer 1 w0.152: v3(15.723,7.874) 15.694,7.902 15.694,11.503 v3(15.748,11.557)
  Bottom Layer w0.152: v3(15.723,7.874) 27.432,7.874 v3(28.067,7.239)
USB_HS_P: U20.18 USB2.3 | length 53.2
  Top Layer w0.152: v3(6.604,16.377) 6.731,16.25 U20.18@7.65,16.25
  Signal Layer 1 w0.254: v3(6.604,16.377) 6.742,16.377 6.619,16.254 6.865,16.254 7.235,15.884 7.235,15.362 6.865,14.992 6.691,14.992 5.74,14.041 5.74,3.124 7.722,1.143 35.941,1.143 37.952,3.154 37.952,4.808 38.227,5.083 38.227,6.096 38.557,6.426 v3(38.684,6.426)
USB_HS_RESET: R64.1 U20.27 U24.8 | length 19.8
  Top Layer w0.152: U20.27@9.5,12.4 v3(9.5,11.43) ; R64.1@9.75,11 9.5,11.25 v3(9.5,11.43) ; v3(12.7,8.128) 10.541,8.128 9.144,9.525 9.144,11.074 v3(9.5,11.43) ; v3(22.098,6.985) 22.686,6.985 23.027,7.326 U24.8@23.027,8.452
  Bottom Layer w0.152: v3(12.7,8.128) 13.843,6.985 v3(22.098,6.985)
USB_HS_STP: U20.29 U24.15 | length 31.1
  Top Layer w0.152: v3(10.5,11.481) U20.29@10.5,12.4 ; U24.15@26.527,8.452 26.527,5.198 27.432,4.293 28.321,4.293 v3(28.6,4.572)
  Signal Layer 1 w0.152: v3(10.5,11.481) 11.024,11.481 11.049,11.506 12.247,10.308 12.247,7.94 12.268,7.919 v3@12.268,4.801
  Bottom Layer w0.152: v3(12.319,4.75) 12.778,4.29 27.842,4.29 28.124,4.572 v3(28.6,4.572)
VCC-IF: C202.2 R70.1 R71.2 U33.5 | length 4.5
  Top Layer w0.254: R70.1@45.136,53.272 U33.5@45.136,51.369 R71.2@47.767,51.369
VCCO: C79.1 R71.1 U9.6 U9.11 | length 9.7
  Top Layer w0.254: R71.1@47.828,52.316 48.227,52.715 U9.6@48.227,55.992 U9.11@48.227,61.892
VSYS: C35.1 C36.1 C197.1 C198.1 T11.1 U5.10 U5.11 U5.12 U5.13 U32.10 U32.11 U32.12 U32.13 | length 13
  Top Layer w0.508: 62.357,37.033 62.357,49.934 C36.1@62.396,49.973
VTUNE: C184.1 R73.1 U14.20 | length 1.1
  Top Layer w0.254: C184.1@66.464,86.283 v2@66.464,86.538 ; v2@66.464,86.563 v2@66.464,86.538 ; U14.20@66.464,87.334 v2@66.464,86.538 ; v2(66.497,86.538) v2@66.464,86.538
VTUNE2: C146.1 R87.1 U18.20 | length 2
  Top Layer w0.152: R87.1@6.27,37.998 6.27,37.609 6.774,37.105 U18.20@7.715,37.105
pads on no net: B1.5 P2.4 U1.B3 U1.B5 U1.B14 U1.B15 U1.B16 U1.C3 U1.C5 U1.C6 U1.C7 U1.C8 U1.C11 U1.C13 U1.D3 U1.D5 U1.D6 U1.D8 U1.D9 U1.D11 U1.D12 U1.D14 U1.E3 U1.E4 U1.E6 U1.E7 U1.E8 U1.E11 U1.E12 U1.E13 U1.E15 U1.F3 U1.F4 U1.F5 U1.F6 U1.F7 U1.F9 U1.F10 U1.F12 U1.F13 U1.F14 U1.G3 U1.G5 U1.G6 U1.G11 U1.G12 U1.G14 U1.H11 U1.H13 U1.H14 U1.J11 U1.J12 U1.J13 U1.K3 U1.K5 U1.K6 U1.K11 U1.K12 U1.K14 U1.L4 U1.L5 U1.L7 U1.L8 U1.L10 U1.L12 U1.L13 U1.M1 U1.M2 U1.M3 U1.M4 U1.M5 U1.M6 U1.M7 U1.M9 U1.M10 U1.M11 U1.M12 U1.M13 U1.M14 U1.N1 U1.N3 U1.N4 U1.N5 U1.N6 U1.N8 U1.N9 U1.N12 U1.N14 U1.N16 U1.P1 U1.P2 U1.P4 U1.P5 U1.P6 U1.P7 U1.P8 U1.P9 U1.P11 U1.P12 U1.P15 U1.P16 U1.R1 U1.R2 U1.R9 U1.R12 U1.R14 U1.R15 U1.R16 U1.T12 U1.T13 U1.T14 U1.T15 U2.3 U5.4 U6.4 U6.5 U6.6 U6.7 U6.8 U6.9 U6.11 U6.12 U6.13 U6.14 U6.15 U6.16 U6.17 U6.18 U6.20 U6.21 U6.22 U6.23 U6.25 U6.26 U7.4 U11.2 U12.2 U13.2 U16.5 U17.2 U19.2 U20.12 U20.15 U20.16 U20.17 U24.7 U24.9 U24.13 U24.16 U24.24 U24.25 U24.33 U24.34 U24.37 U24.54 U24.55 U24.56 U24.58 U24.59 U24.60 U24.61 U24.62 U24.69 U24.77 U24.82 U24.84 U24.85 U24.86 U24.87 U24.88 U24.90 U24.92 U24.93 U24.95 U24.96 U25.22 U26.4 U27.4 U28.4 U31.4 U32.4 U33.4 U34.4 Y7.2 Y7.6
copper on no net: | length 70.7
  Top Layer w0.152: v2(37.085,9.51) 37.585,10.01 ; v2(37.085,10.51) 37.585,11.01 ; v2(37.085,11.51) 37.585,12.01 ; v2(37.085,12.51) 37.585,13.01 ; v2(38.085,9.51) 38.585,10.01 ; v2(38.085,10.51) 38.585,11.01 ; v2(39.085,11.51) 39.585,12.01 ; v2(39.085,12.51) 39.585,13.01 ; v2(39.085,14.51) 39.585,15.01 ; v2(39.085,18.51) 39.585,18.01 ; v2(39.085,19.51) 39.585,19.01 ; v2(39.085,20.51) 39.585,20.01 ; v2(39.085,21.51) 39.585,21.01 ; v2(39.085,22.51) 39.585,22.01 ; v2(39.085,23.51) 39.585,23.01 ; v2(40.085,10.51) 40.585,11.01 ; v2(40.085,11.51) 40.585,12.01 ; v2(40.085,12.51) 40.585,13.01 ; v2(40.085,13.51) 40.585,14.01 ; v2(40.085,19.51) 40.585,19.01 ; v2(41.085,10.51) 41.585,11.01 ; v2(41.085,11.51) 41.585,12.01 ; v2(41.085,12.51) 41.585,13.01 ; v2(41.085,13.51) 41.585,14.01 ; v2(41.085,14.51) 41.585,15.01 ; v2(41.085,18.51) 41.585,18.01 ; v2(41.085,19.51) 41.585,19.01 ; v2(41.085,21.51) 41.585,21.01 ; v2(41.085,22.51) 41.585,22.01 ; v2(42.085,10.51) 42.585,11.01 ; v2(42.085,11.51) 42.585,12.01 ; v2(42.085,12.51) 42.585,13.01 ; v2(42.085,14.51) 42.585,15.01 ; v2(42.085,18.51) 42.585,18.01 ; v2(42.085,19.51) 42.585,19.01 ; v2(42.085,20.51) 42.585,20.01 ; v2(42.085,21.51) 42.585,21.01 ; v2(42.085,22.51) 42.585,22.01 ; v2(43.085,10.51) 43.585,11.01 ; v2(43.085,12.51) 43.585,13.01 ; v2(43.085,13.51) 43.585,14.01 ; v2(43.085,19.51) 43.585,19.01 ; v2(43.085,20.51) 43.585,20.01 ; v2(43.085,22.51) 43.585,22.01 ; v2(44.085,10.51) 44.585,11.01 ; v2(44.085,11.51) 44.585,12.01 ; v2(44.085,13.51) 44.585,14.01 ; v2(44.085,20.51) 44.585,20.01 ; v2(44.085,21.51) 44.585,21.01 ; v2(44.085,22.51) 44.585,22.01 ; 45.585,10.01 v2(46.085,9.51) ; 45.585,11.01 v2(46.085,10.51) ; 45.585,12.01 v2(46.085,11.51) ; 45.585,13.01 v2(46.085,12.51) ; 45.585,19.01 v2(46.085,19.51) ; 45.585,21.01 v2(46.085,21.51) ; 46.585,13.01 v2(47.085,12.51) ; 46.585,19.01 v2(47.085,19.51) ; 47.585,13.01 v2(48.085,12.51) ; 47.585,15.01 v2(48.085,14.51) ; 47.585,16.01 v2(48.085,15.51) ; 47.585,17.01 v2(48.085,17.51) ; 47.585,18.01 v2(48.085,18.51) ; 47.585,20.01 v2(48.085,20.51) ; 47.585,21.01 v2(48.085,21.51) ; 47.585,22.01 v2(48.085,22.51) ; 48.585,12.01 v2(49.085,11.51) ; 48.585,13.01 v2(49.085,12.51) ; 48.585,14.01 v2(49.085,13.51) ; 48.585,15.01 v2(49.085,14.51) ; 48.585,16.01 v2(49.085,15.51) ; 48.585,18.01 v2(49.085,18.51) ; 48.585,19.01 v2(49.085,19.51) ; 48.585,20.01 v2(49.085,20.51) ; 48.585,21.01 v2(49.085,21.51) ; 49.585,9.01 v2(50.085,8.51) ; 49.585,13.01 v2(50.085,12.51) ; 49.585,14.01 v2(50.085,13.51) ; 49.585,16.01 v2(50.085,15.51) ; 49.585,17.01 v2(50.085,17.51) ; 49.585,19.01 v2(50.085,19.51) ; 49.585,20.01 v2(50.085,20.51) ; 50.585,9.01 v2(51.085,8.51) ; 50.585,10.01 v2(51.085,9.51) ; 50.585,12.01 v2(51.085,11.51) ; 50.585,13.01 v2(51.085,12.51) ; 50.585,15.01 v2(51.085,14.51) ; 50.585,17.01 v2(51.085,17.51) ; 50.585,18.01 v2(51.085,18.51) ; 50.585,19.01 v2(51.085,19.51) ; 50.585,21.01 v2(51.085,21.51) ; 51.585,9.01 v2(52.085,8.51) ; 51.585,10.01 v2(52.085,9.51) ; 51.585,11.01 v2(52.085,10.51) ; 51.585,20.01 v2(52.085,20.51) ; 51.585,23.01 v2(52.085,23.51) ; 52.585,10.01 v2(53.085,9.51) ; 52.585,11.01 v2(53.085,10.51) ; 52.585,12.01 v2(53.085,11.51) ; 52.585,23.01 v2(53.085,23.51)

## Polygon pours and split planes (outlines as drawn)
GND on Bottom Layer "Bottom Layer-No Net" (solid, remove dead copper, pour order 5): 0,0 0,100 77,100 77,0
1.2 on Bottom Layer "Bottom Layer-No Net" (solid, remove dead copper, pour order 2): 42.672,18.923 42.672,15.113 43.688,14.097 47.498,14.097 47.498,17.78 46.355,18.923
3.3D on Signal Layer 1 "Bottom Layer-No Net" (solid, remove dead copper, pour order 3): 4.267,-0.051 4.166,0.051 4.166,26.645 39.192,26.645 39.218,26.67 39.218,36.754 55.626,36.754 55.702,36.754 55.702,-0.102
NetR47_1 on Top Layer "Bottom Layer-No Net" (solid, remove dead copper, pour order 7): 34.671,1.447 34.671,6.325 43.358,6.325 43.358,1.423